# Altium PCB SkyDriver飞行控制器-IMU板V2.PcbDoc
Units mil, origin at the board's own origin, x right, y up, seen from the top; angles counter-clockwise.
Board outline 865 x 865 mil, 2 copper layers (Top Layer, Bottom Layer); 43 components, 19 nets, 149 pads, 44 vias.
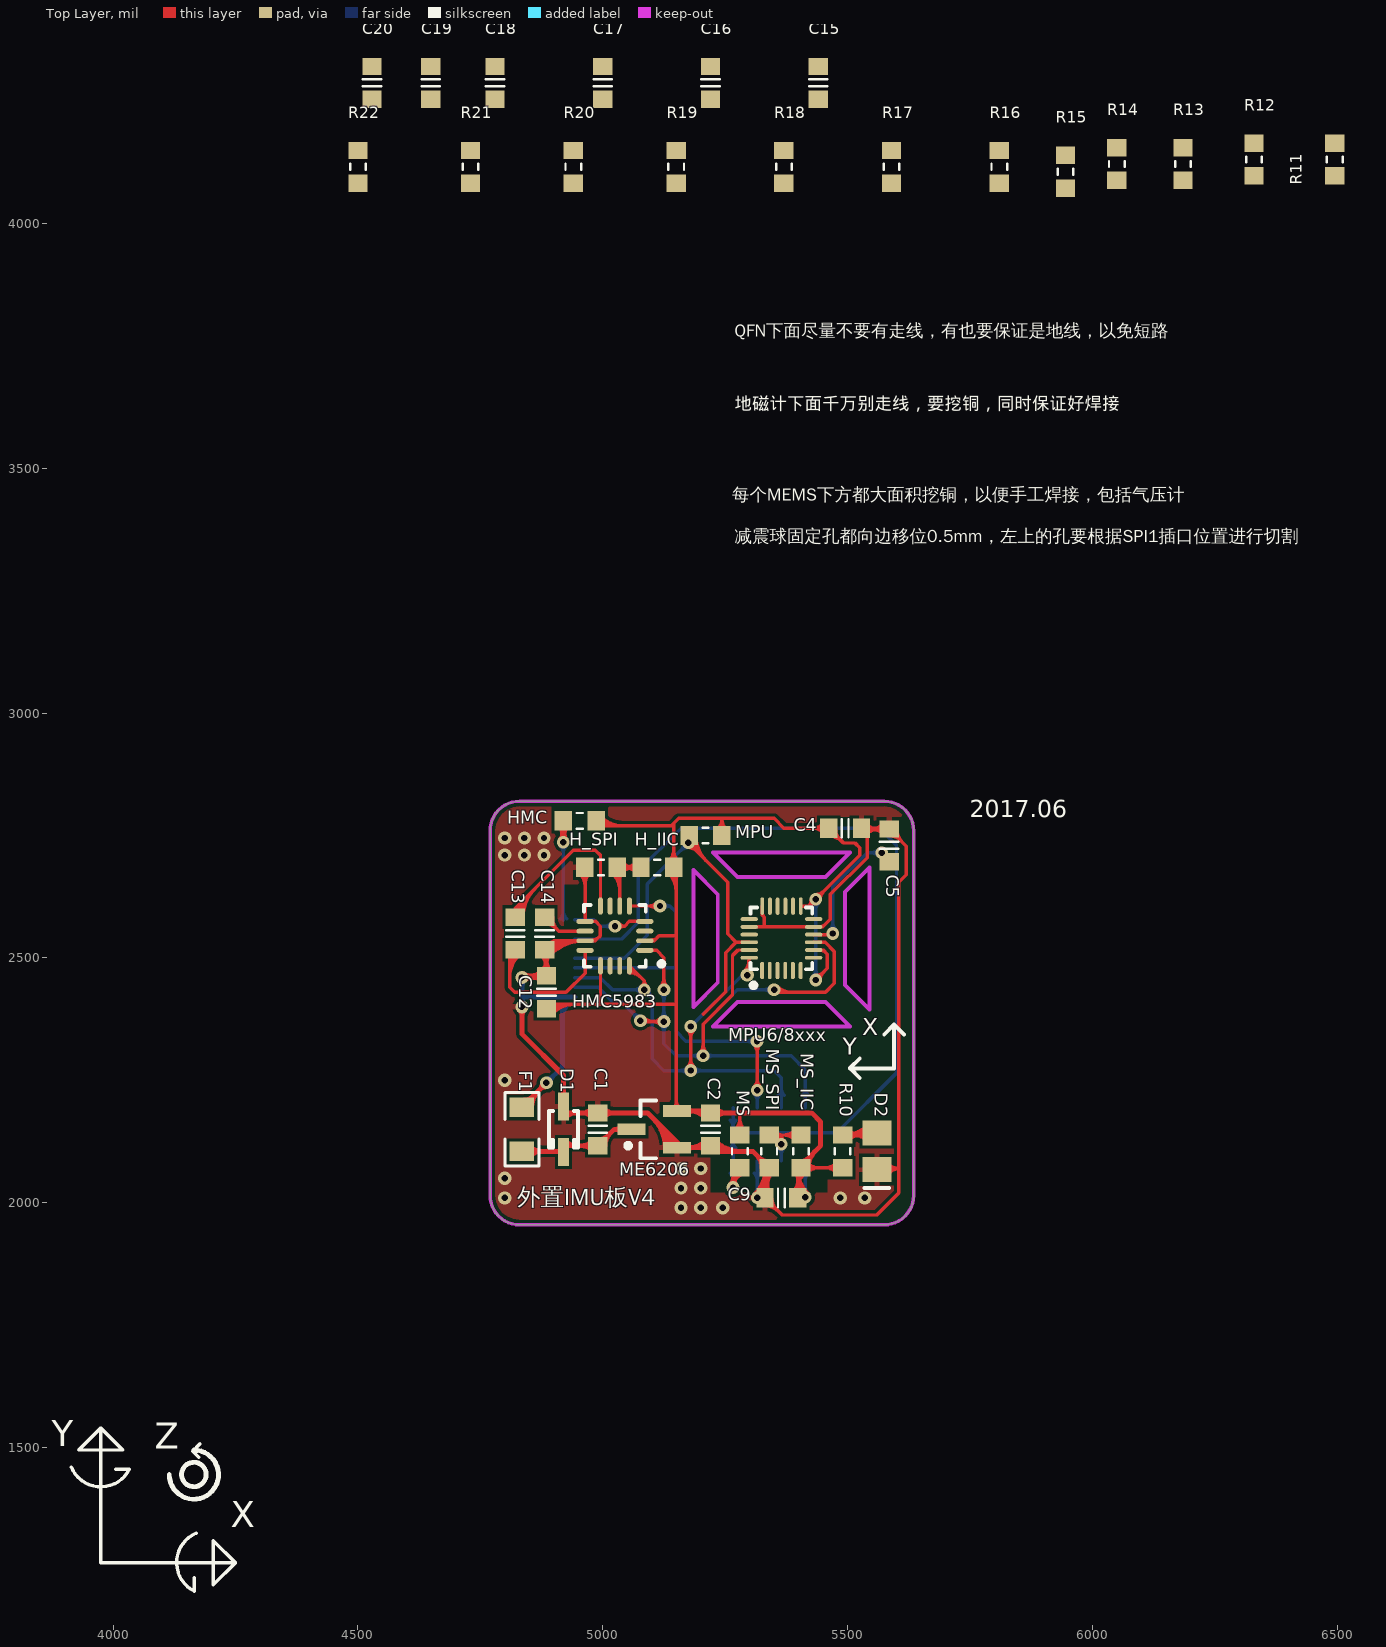
[diagram p0: Top Layer view]
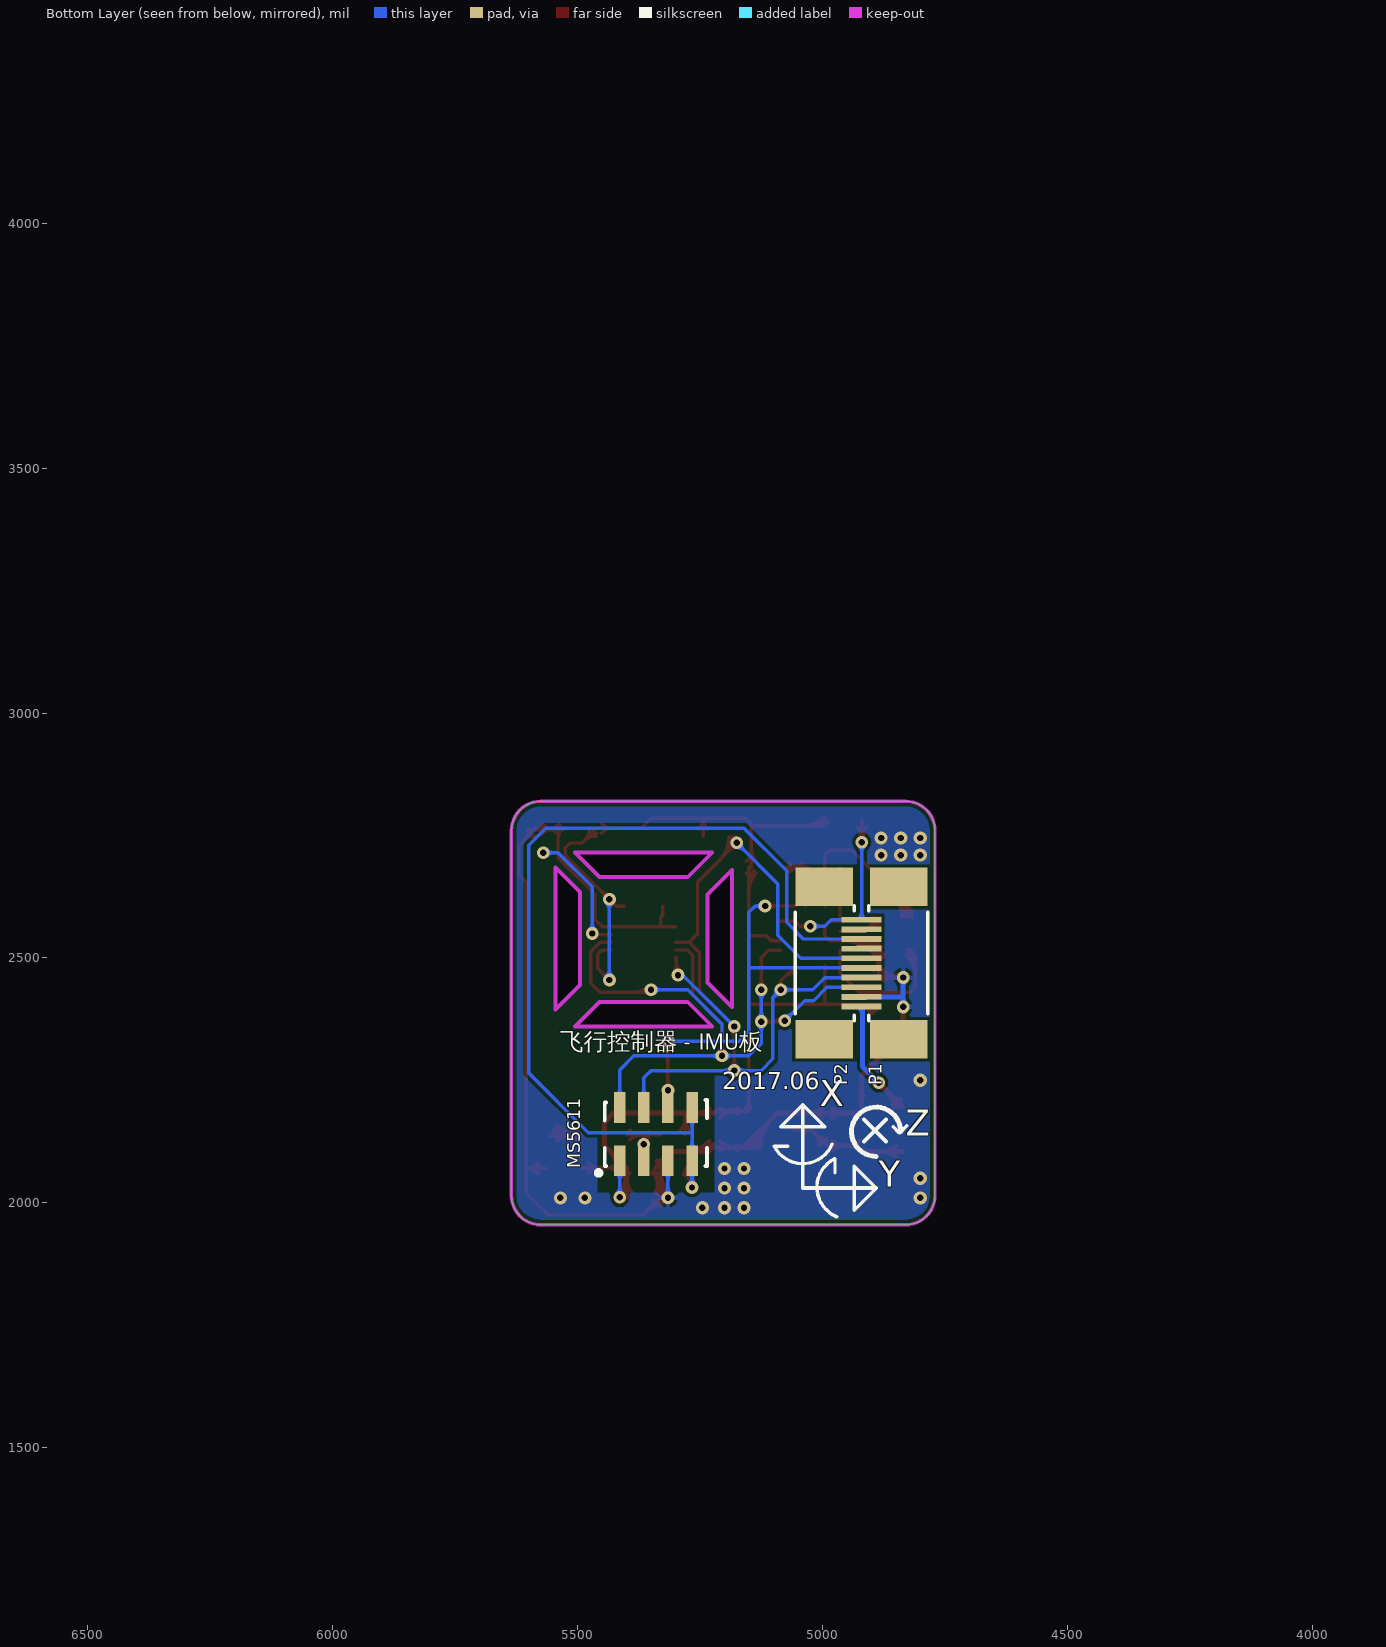
[diagram p1: Bottom Layer view, seen from below]

## Layer stack, top to bottom
Top Solder: solder mask 0.4, Solder Resist, Dk 3.5
Top Layer: signal copper 1.4
Dielectric1: dielectric 12.6, FR-4, Dk 4.8
Bottom Layer: signal copper 1.4
Bottom Solder: solder mask 0.4, Solder Resist, Dk 3.5

## Board outline
4770,2015 4770,2760 cw(c4830,2760) 4830,2820 5575,2820 cw(c5575,2760) 5635,2760 5635,2015 cw(c5575,2015) 5575,1955 4830,1955 cw(c4830,2015)
cut-out: 5225,2360 5505,2360 5455,2410 5275,2410
cut-out: 5495,2445 5545,2395 5545,2685 5495,2635
cut-out: 5185,2400 5185,2680 5235,2630 5235,2450
cut-out: 5185,2400 5185,2680 5235,2630 5235,2450
cut-out: 5225,2715 5275,2665 5455,2665 5505,2715

## Design rules (kind name [scope] priority, off if disabled: settings)
Clearance [All] p1: gap=7 ignorepadtopadclearanceinfootprint=FALSE except(0: Arc-Hole Track-Hole SMDPad-Hole THPad-Hole Via-Hole Fill-Hole Poly-Hole Region-Hole Text-Hole)
ComponentClearance [All] p1 off: gap=10 collisioncheckmode=3 verticalgap=10 showdistances=FALSE
PolygonConnect [All] p1: connectstyle=Relief reliefconductorwidth=10 reliefentries=4 polygonreliefangle="90 Angle" airgapwidth=10
RoutingVias [All] p1: holewidth=13 width=26 viastyle="Through Hole" minholewidth=12 minwidth=24 maxholewidth=240 maxwidth=255
SMDNeckDown [All] p1: percent=50.000
SilkToSolderMaskClearance SilkscreenOverComponentPads [IsPad] p1: minsilkscreentomaskgap=10 clearancetoexposedcopper=TRUE
SolderMaskExpansion [All] p1: expansion=4
Width [All] p1: maxlimit=200 minlimit=6 preferedwidth=7
28 further rules are at their usual default settings.

## Components (designator, comment, footprint, x,y, rotation, side; value= is the part's Value field where it differs from the comment)
C1 "Cap_0603" CAP_0603 4990,2150 r90 top
C2 "Cap_0603" CAP_0603 5220,2150 r270 top
C4 "Cap_0603" CAP_0603 5495,2765 r0 top
C5 "Cap_0603" CAP_0603 5585,2730 r270 top
C9 "Cap_0603" CAP_0603 5365,2010 r0 top
C12 "Cap_0603" CAP_0603 4885,2430 r270 top
C13 "Cap_0603" CAP_0603 4821.38,2550 r270 top
C14 "Cap_0603" CAP_0603 4881.38,2550 r90 top
C15 "Cap_0603" CAP_0603 5440,4287.28 r90 top
C16 "Cap_0603" CAP_0603 5220,4287.28 r90 top
C17 "Cap_0603" CAP_0603 5000,4287.28 r90 top
C18 "Cap_0603" CAP_0603 4780,4287.28 r90 top
C19 "Cap_0603" CAP_0603 4648.62,4287.28 r90 top
C20 "Cap_0603" CAP_0603 4528.62,4287.28 r90 top
D1 "SS14" SOD323 4920,2150 r270 top
D2 "LED0" LED_0805 5560,2105 r270 top
F1 "Fuse" 0805s 4835,2195 r270 top
H_IIC "Res_0603" RES_0603 5111.54,2685 r180 top
H_SPI "Res_0603" RES_0603 4996.54,2685 r0 top
HMC "Res_0603" RES_0603 4953,2780 r180 top
HMC5983 "HMC5983" "QFN16M - 3*3" 5025,2545 r180 top
ME6206 "ME6206" sot23_M 5105,2150 r180 top
MPU "Res_0603" RES_0603 5210,2750 r180 top
MPU6/8xxx "MPU6500/6881" "QFN24M - 3*3" 5365,2540 r90 top
MS "Res_0603" RES_0603 5280,2105 r270 top
MS5611 "MS5611" "QFN8 - MS5611" 5340,2140 r90 bottom
MS_IIC "Res_0603" RES_0603 5405,2105 r90 top
MS_SPI "Res_0603" RES_0603 5340,2105 r90 top
P1 "Header 10" "FPC0.5 - Header10" 4867,2485 r180 bottom
P2 "Header 10" "FPC0.5 - Header10" 4973,2494 r0 bottom
R10 "Res_0603" RES_0603 5490,2105 r270 top
R11 "Res_0603" RES_0603 6495,4130.75 r90 top
R12 "Res_0603" RES_0603 6330,4130.75 r90 top
R13 "Res_0603" RES_0603 6185,4121.5 r90 top
R14 "Res_0603" RES_0603 6050,4121.5 r90 top
R15 "Res_0603" RES_0603 5945,4105.75 r90 top
R16 "Res_0603" RES_0603 5810,4115.75 r90 top
R17 "Res_0603" RES_0603 5590,4115.75 r90 top
R18 "Res_0603" RES_0603 5370,4115.75 r90 top
R19 "Res_0603" RES_0603 5150,4115.75 r90 top
R20 "Res_0603" RES_0603 4940,4115.75 r90 top
R21 "Res_0603" RES_0603 4730,4115.75 r90 top
R22 "Res_0603" RES_0603 4500,4115.75 r90 top

## Footprints (in the part's own frame and the unit in brackets; to place one, negate y for a bottom-side part, rotate by r counter-clockwise, add the part's x,y. Pads: shape width x height; smd on the part's side, far side on the other; paste and mask are expansions set on the pad)
0805s [mil]
  rect 40x50 smd: 1(0,0) 2(90,0)
  silkscreen extent -30,-35 120,35
CAP_0603 [mm]
  rect 0.9x1 smd: 1(-0.85,0) 2(0.85,0)
  Top Layer pour cut-out: -0.4,0.6 0.4,0.6 0.4,-0.6 -0.4,-0.6
  silkscreen extent -0.18,-0.48 0.18,0.48, body extent -0.85,-0.45 0.85,0.45, height 0.89
"FPC0.5 - Header10" [mm]
  rect 3x2 smd: 0(0.584,-3.835) 0(0.584,4.064)
  rect 1.3x0.3 smd: 1(-1.727,2.362) 2(-1.727,1.862) 3(-1.727,1.362) 4(-1.727,0.862) 5(-1.727,0.362) 6(-1.727,-0.138) 7(-1.727,-0.638) 8(-1.727,-1.138) 9(-1.727,-1.638) 10(-1.727,-2.138)
  silkscreen extent -1.73,-2.87 2.08,3.1
LED_0805 [mm]
  rect 1.3x1.5 smd: 1(-0.95,0) 2(0.95,0)
  silkscreen extent 1.91,-0.63 1.91,0.64
"QFN8 - MS5611" [mm]
  rect 1.6x0.6 smd: 1(-1.377,1.875) 2(-1.377,0.625) 3(-1.377,-0.625) 4(-1.377,-1.875) 5(1.377,-1.875) 6(1.377,-0.625) 7(1.377,0.625) 8(1.377,1.875)
  silkscreen extent -2.13,-2.65 1.78,3.1, body extent -1.6,-2.5 1.6,2.5, height 1
"QFN16M - 3*3" [mm]
  oval 0.9x0.25 smd: 1(-1.55,0.75) 2(-1.55,0.25) 3(-1.55,-0.25) 4(-1.55,-0.75) 9(1.55,-0.75) 10(1.55,-0.25) 11(1.55,0.25) 12(1.55,0.75)
  oval 0.25x0.9 smd: 5(-0.75,-1.55) 6(-0.25,-1.55) 7(0.25,-1.55) 8(0.75,-1.55) 13(0.75,1.55) 14(0.25,1.55) 15(-0.25,1.55) 16(-0.75,1.55)
  silkscreen extent -2.54,-1.6 1.6,1.6, body extent -1.58,-1.58 1.58,1.58, height 0.8
"QFN24M - 3*3" [mm]
  oval 0.9x0.2 smd: 1(-1.67,1.003) 2(-1.67,0.603) 3(-1.67,0.203) 4(-1.67,-0.197) 5(-1.67,-0.597) 6(-1.67,-0.997) 13(1.67,-1.003) 14(1.67,-0.603) 15(1.67,-0.203) 16(1.67,0.197) 17(1.67,0.597) 18(1.67,0.997)
  oval 0.2x0.9 smd: 7(-1.003,-1.67) 8(-0.603,-1.67) 9(-0.203,-1.67) 10(0.197,-1.67) 11(0.597,-1.67) 12(0.997,-1.67) 19(0.997,1.67) 20(0.597,1.67) 21(0.197,1.67) 22(-0.203,1.67) 23(-0.603,1.67) 24(-1.003,1.67)
  silkscreen extent -2.56,-1.6 1.6,1.6, body extent -1.58,-1.58 1.58,1.58, height 0.8
RES_0603 [mm]
  rect 0.9x1 smd: 1(-0.85,0) 2(0.85,0)
  Top Layer pour cut-out: -0.4,0.6 0.4,0.6 0.4,-0.6 -0.4,-0.6
  silkscreen extent -0.15,-0.41 0.15,0.41, body extent -0.87,-0.47 0.88,0.48, height 0.54
SOD323 [mm] "SOD-323/SC-76; 2"
  rect 1.45x0.55 smd: 1(1.175,0) 2(-1.175,0)
  silkscreen extent -0.95,-0.75 0.95,0.75
sot23_M [mm] "SOT23, 3-Leads, Body 2.9x1.3mm, Pitch 0.95mm, Lead Span 2.3mm - R"
  rect 1.45x0.6 smd: 1(1.175,0) 2(-1.175,-0.95) 3(-1.175,0.95)
  silkscreen extent -0.1,-1.5 1.47,1.5, body extent -0.7,-1.5 0.7,1.5, height 1.1

## Part data
C1 C2 C4 C5 C9 C12 C13 C14 C15 C16 C17 C18 C19 C20: library part Cap
D1: library part "Diode 1N4007", "1 Amp General Purpose Rectifier"
D2: "Typi"
H_IIC H_SPI HMC MPU MS MS_IIC MS_SPI R10 R11 R12 R13 R14 R15 R16 R17 R18 R19 R20 R21 R22: library part Res

## Via types
v1: diameter 26, hole 13, Top Layer to Bottom Layer, 25 vias
v2: diameter 27, hole 13, Top Layer to Bottom Layer, 19 vias

## Nets (pads, with @x,y where several pads share a name; then routed paths per layer and width w, separated by ;. In a path a pad name is that pad's centre, name@x,y a point inside that pad or via, vN(x,y) a via of type N, cw(c..) or ccw(c..) an arc to the next point about the centre after c; other vN are vias at no path point)
+3V3: C2.1 C4.1 C9.2 C12.2 H_IIC.1 HMC5983.2 HMC5983.13 HMC.1 ME6206.2 MPU6/8xxx.8 MPU6/8xxx.13 MPU.1 MS5611.1 MS.1 MS_IIC.1 R10.2 | length 4308.4
  Top Layer w7: C12.2@4885,2405 5150,2405 ; C12.2@4887.12,2396.38 cw(c4907.92,2375.58) 4907.92,2405 ; C12.2@4892.07,2391.43 cw(c4924.82,2358.68) 4924.82,2405 ; C12.2@4897.02,2386.48 cw(c4941.72,2341.78) 4941.72,2405 ; HMC.1@4986.62,2778.18 ccw(c5006.38,2797.94) 5006.38,2770 ; HMC.1@4991.57,2783.13 ccw(c5023.28,2814.84) 5023.28,2770 ; 4995.47,2405 HMC5983.13 ; HMC.1@4996.46,2770 5140,2770 5145,2775 ; HMC.1@4996.52,2788.08 ccw(c5040.17,2831.74) 5040.17,2770 ; HMC5983.2 5105.16,2535.16 5115,2545 5150,2545 ; HMC5983.2@5098.82,2536.58 ccw(c5098.82,2555.32) 5112.07,2542.07 ; H_IIC.1@5134.95,2672.98 cw(c5098.61,2636.64) 5150,2636.64 ; H_IIC.1@5134.95,2697.02 ccw(c5110.68,2721.29) 5145,2721.29 ccw(c5179.32,2721.29) H_IIC.1@5155.05,2697.02 ; H_IIC.1@5139.9,2677.93 cw(c5115.51,2653.54) 5150,2653.54 ; H_IIC.1 5145,2775 ; ME6206.2@5145.38,2193.28 ccw(c5134.24,2204.42) 5150,2204.42 ; ME6206.2@5150,2188.66 5150,2405 ; 5150,2210.51 ccw(c5174.37,2210.51) ME6206.2@5157.14,2193.28 ; 5150,2660.78 cw(c5167.25,2660.78) H_IIC.1@5155.05,2672.98 ; H_IIC.1@5150,2685 5150,2545 ; MPU.1@5234.06,2762.63 ccw(c5215.68,2783.46) 5243.47,2783.46 ; MPU.1 5243.47,2783.47 ; MPU.1@5252.87,2762.63 cw(c5271.25,2783.46) 5243.47,2783.46 ; MS.1@5269.95,2148.52 ccw(c5245.68,2172.79) 5280,2172.79 ccw(c5314.32,2172.79) MS.1@5290.05,2148.52 ; MS.1 5280,2183.46 ; C9.2@5388.41,2022.02 ccw(c5364.14,2046.29) 5398.47,2046.29 ccw(c5432.79,2046.29) C9.2@5408.52,2022.02 ; C9.2@5391.19,2024.18 ccw(c5379.72,2043.43) 5401.44,2037.93 ; MS_IIC.1@5392.98,2061.48 cw(c5379.73,2048.24) 5398.47,2048.24 ; C9.2 5398.47,2070 ccw(c5470.98,2070) v1@5420.44,2017.99 ; C9.2@5398.47,2020.3 ccw(c5422.68,2020.3) C9.2@5405.8,2002.93 ; C9.2@5398.47,2026.19 cw(c5448.37,2026.19) MS_IIC.1@5413.08,2061.48 ; 5398.47,2036.87 ccw(c5438.78,2036.87) C9.2@5410.68,2007.95 ; 5398.47,2043.09 cw(c5431.48,2043.09) MS_IIC.1@5408.13,2066.43 ; 5398.47,2053.43 ccw(c5454.88,2053.43) C9.2@5415.56,2012.97 ; 5399.8,2031.48 ccw(c5414.77,2027.69) C9.2@5403.66,2016.98 ; 5402.07,2033.19 cw(c5379.76,2020.31) C9.2@5404.64,2013.64 ; C9.2@5402.69,2018.74 ccw(c5411.59,2023.67) C9.2@5413.38,2013.64 ; 5402.89,2043.68 ccw(c5425.43,2037.98) C9.2@5408.7,2021.84 ; 5403.08,2031.99 cw(c5383.39,2021.09) C9.2@5404.79,2014.12 ; 5404.07,2029.73 ccw(c5421.48,2039.78) v1@5416.28,2020.36 ; 5404.1,2030.14 ccw(c5422.14,2040.12) v1@5416.44,2020.31 ; MPU6/8xxx.13 5420.74,2605.74 ; MS_IIC.1 R10.2@5495,2071.54 ; MS_IIC.1@5417.02,2061.48 cw(c5441.29,2037.21) 5441.29,2071.54 cw(c5441.29,2105.85) MS_IIC.1@5417.02,2081.59 ; v1@5425.54,2619.1 cw(c5408.97,2617.52) 5420.74,2605.74 ; MPU6/8xxx.8 5450.08,2516.25 5458.96,2507.37 5458.96,2478.96 v1(5435,2455) ; v1@5434.1,2610.54 ccw(c5432.52,2593.97) 5420.74,2605.74 ; v1@5435,2464.5 ccw(c5435,2487.43) 5451.22,2471.22 ccw(c5467.44,2455) v1@5444.5,2455 ; v1@5435,2629.5 ccw(c5435,2652.43) 5451.22,2636.22 ccw(c5467.44,2620) v1@5444.5,2620 ; MPU6/8xxx.8@5444.52,2515.81 cw(c5444.52,2501.35) 5454.75,2511.58 ; C4.1@5451.48,2754.95 ccw(c5427.21,2730.68) 5427.21,2765 ccw(c5427.21,2799.32) C4.1@5451.48,2775.05 ; C4.1@5461.53,2748.81 cw(c5461.53,2709.74) 5489.16,2737.37 ; C4.1@5461.53,2755.81 cw(c5461.53,2733.64) C4.1@5477.21,2749.32 ; C4.1@5475.75,2763.03 ccw(c5505.32,2763.03) 5484.41,2742.12 ; R10.2@5477.98,2061.48 ccw(c5453.71,2037.21) 5453.71,2071.54 ccw(c5453.71,2105.86) R10.2@5477.98,2081.59 ; 5145,2775 5155,2785 5350,2785 5370,2765 C4.1 5491.72,2734.81 5515.19,2734.81 5525,2725 5525,2710 v1(5435,2620) 5420.74,2605.74 ; 5150,2405 5150,2545
  Top Layer w10: ME6206.2 C2.1@5216.06,2187.4 ; ME6206.2@5172.81,2182.59 cw(c5184.44,2170.96) 5184.44,2187.4 cw(c5184.44,2203.84) ME6206.2@5172.81,2192.22 ; ME6206.2@5177.83,2187.4 cw(c5177.83,2143.26) C2.1@5209.04,2174.47 ; 5196.83,2187.4 ccw(c5196.83,2204.66) C2.1@5209.04,2192.46 ; C2.1 5426.53,2183.47 5445,2165 5445,2116.54 MS_IIC.1@5400,2071.53 ; C2.1@5230.96,2174.47 cw(c5252.67,2152.76) 5252.67,2183.47 cw(c5252.67,2214.17) C2.1@5230.96,2192.46 ; MS_IIC.1@5406.97,2084.25 ccw(c5406.97,2098.13) MS_IIC.1@5416.78,2088.32 ; MS_IIC.1@5409.68,2071.53 cw(c5433.07,2071.53) MS_IIC.1@5416.53,2088.07 ; MS_IIC.1@5419.68,2071.53 cw(c5467.21,2071.53) 5433.6,2105.14
  Bottom Layer w7: v1@5407.1,2017.9 ccw(c5390.88,2034.12) 5413.82,2034.12 ccw(c5436.75,2034.12) v1@5420.54,2017.9 ; MS5611.1@5407.94,2060.23 cw(c5393.75,2046.04) 5413.82,2046.04 cw(c5433.88,2046.04) MS5611.1@5419.7,2060.23 ; v1(5413.82,2011.18) MS5611.1 ; v1@5428.28,2461.72 ccw(c5412.06,2477.93) 5435,2477.93 ccw(c5457.94,2477.93) v1@5441.72,2461.72 ; v1@5428.28,2613.28 cw(c5412.06,2597.07) 5435,2597.07 cw(c5457.94,2597.07) v1@5441.72,2613.28 ; v1(5435,2455) v1(5435,2620)
AK_CS: P1.4 P2.7
BMP_CS: P1.2 P2.9
GND: C1.2 C2.2 C4.2 C5.1 C9.1 C12.1 C14.1 D1.2 D2.2 H_SPI.1 HMC5983.9 HMC5983.11 ME6206.3 MPU6/8xxx.11 MPU6/8xxx.18 MPU6/8xxx.20 MS5611.3 MS_SPI.1 P1.9 P2.2 | length 5134.8
  Top Layer w7: C14.1@4873.29,2506.48 cw(c4845.04,2478.23) C12.1@4885,2478.23 ; C12.1@4874.95,2473.52 ccw(c4850.68,2497.79) 4885,2497.79 ccw(c4919.32,2497.79) C12.1@4895.05,2473.52 ; C12.1@4876.63,2476.16 ccw(c4871.75,2485.83) 4882.21,2488.63 ; C14.1@4878.24,2511.43 cw(c4861.94,2495.13) 4885,2495.13 ; C14.1@4878.55,2521.33 cw(c4911.93,2487.95) 4911.93,2535.16 ; C14.1 4900,2535.16 ; 4883.25,2484.75 ccw(c4897.53,2488.58) C12.1@4890.14,2475.78 ; C14.1@4883.5,2516.38 cw(c4928.83,2471.05) 4928.83,2535.16 ; C12.1 C14.1@4885,2512.91 ; 4885,2486.2 cw(c4913.68,2486.2) 4893.4,2506.48 cw(c4962.63,2437.25) HMC5983.11@4962.63,2535.16 ; C14.1@4885.67,2530.56 ccw(c4888.37,2546.79) 4900,2535.16 ; C14.1@4888.45,2511.43 cw(c4945.73,2454.15) 4945.73,2535.16 ; C14.1@4896.78,2521.18 cw(c4909.56,2525.6) 4900,2535.16 ; H_SPI.1@4953.02,2672.98 cw(c4926.56,2646.52) 4963.98,2646.52 ; H_SPI.1@4957.97,2677.93 cw(c4943.46,2663.42) 4963.98,2663.42 ; 4963.98,2650.9 cw(c4995.2,2650.9) H_SPI.1@4973.12,2672.98 ; H_SPI.1@4963.98,2684.09 HMC5983.9 4985.47,2574.53 4995,2565 4995,2545 4985.16,2535.16 HMC5983.11 4900,2535.16 ; HMC5983.11@4976.77,2536.58 ccw(c4976.77,2560.26) 4993.51,2543.51 ; MPU6/8xxx.20 5330,2563.5 ; v1@5308.86,2017.29 ccw(c5258.94,2070) 5331.53,2070 C9.1 5366.53,1975 5560,1975 5605,2020 5605,2070 ; v1@5312.93,2019.57 ccw(c5307.48,2039.94) C9.1@5325.74,2029.4 ; v1@5313.67,2012.21 ccw(c5274.36,2053.72) 5331.53,2053.72 ; C9.1@5315.39,2000.89 cw(c5315.39,1939.94) 5358.49,1983.04 ; C9.1@5315.39,2007.89 cw(c5315.39,1963.84) C9.1@5346.54,1994.99 ; C9.1@5315.39,2014.89 cw(c5315.39,1987.74) C9.1@5334.59,2006.94 ; C9.1@5318.49,2007.13 ccw(c5289.77,2037.45) 5331.54,2037.45 ; C9.1@5321.48,2022.02 ccw(c5297.21,2046.29) 5331.54,2046.29 ccw(c5365.86,2046.29) C9.1@5341.59,2022.02 ; C9.1@5323.3,2002.04 ccw(c5305.18,2021.18) C9.1@5331.53,2021.18 ; C9.1@5324.42,2024.27 ccw(c5311.46,2046.69) 5336.47,2040 ; C9.1@5324.57,2012.85 cw(c5348.51,2019.27) 5327.05,2031.66 ; MPU6/8xxx.18 5325.76,2587.29 5330,2583.05 5330,2563.5 ; MPU6/8xxx.18@5326.19,2591.96 ccw(c5338.52,2591.96) 5329.8,2583.24 ; MS_SPI.1@5327.98,2061.48 cw(c5319.39,2052.89) 5331.53,2052.89 ; C9.1@5331.53,1993.81 cw(c5331.53,1954.74) 5359.16,1982.37 ; C9.1@5331.53,2000.81 cw(c5331.53,1978.64) C9.1@5347.21,1994.32 ; C9.1@5331.53,2021.53 cw(c5388.03,2021.53) MS_SPI.1@5348.08,2061.48 ; 5331.53,2038.43 cw(c5371.13,2038.43) MS_SPI.1@5343.13,2066.43 ; 5334.26,2031.74 ccw(c5351.54,2027.12) C9.1@5337.29,2016.33 ; 5337.96,2045.57 ccw(c5365.99,2038.08) C9.1@5342.87,2020.55 ; C9.1@5345.75,2008.03 ccw(c5375.32,2008.03) 5354.41,1987.12 ; MPU6/8xxx.11@5444.52,2563.93 ccw(c5444.52,2576.26) 5453.24,2567.54 ; C4.2 5540,2763.46 5540,2705 5465,2630 5465,2579.31 5449.19,2563.5 MPU6/8xxx.11 5330,2563.5 ; D2.2@5562.4,2070 5605,2070 ; D2.2@5575.7,2077.05 ccw(c5590.4,2088.85) 5590.4,2070 ; D2.2@5577.22,2060.43 cw(c5593.26,2051.76) 5593.26,2070 ; D2.2@5581.16,2081.43 ccw(c5605,2100.57) 5605,2070 ; D2.2@5583.37,2057.1 cw(c5605,2045.42) 5605,2070 ; C5.1 5620,2728.46 5620,2670 5605,2655 5605,2070 ; C5.1@5586.97,2749.25 cw(c5586.97,2719.68) 5607.88,2740.59 ; C5.1@5594.18,2763.47 ccw(c5616.36,2763.47) C5.1@5600.68,2747.79 ; C5.1@5601.18,2763.47 ccw(c5640.26,2763.47) 5612.63,2735.84
  Top Layer w10: v1@4829.34,2394.34 cw(c4815.69,2380.69) 4835,2380.69 cw(c4854.31,2380.69) v1@4840.66,2394.34 ; v1(4835,2400) 4835,2345 4920,2260 D1.2 ; v1(4835,2460) 4881.53,2460 C12.1 ; v1@4839,2466.93 ccw(c4852.62,2490.51) 4859.67,2464.21 ; v1@4840.66,2454.34 cw(c4854.31,2440.69) 4854.31,2460 cw(c4854.31,2479.31) v1@4840.66,2465.66 ; v1@4841.93,2456 cw(c4851.79,2450.3) 4848.85,2461.31 ; v1@4843.96,2460 ccw(c4843.96,2502.53) C12.1@4874.04,2472.46 ; 4860.7,2460 cw(c4860.7,2441.13) C12.1@4874.04,2454.47 ; D1.2@4915.88,2218.1 ccw(c4905.93,2228.04) 4920,2228.04 ccw(c4934.07,2228.04) D1.2@4924.12,2218.1 ; D1.2@4924.12,2174.42 cw(c4945.95,2152.59) 4945.95,2183.47 ; D1.2@4925,2183.47 C1.2 5091.53,2183.47 ME6206.3@5160,2115 ; C1.2@4979.04,2174.47 ccw(c4957.33,2152.76) 4957.33,2183.47 ccw(c4957.33,2214.17) C1.2@4979.04,2192.46 ; C1.2@5000.96,2174.47 cw(c5022.67,2152.76) 5022.67,2183.47 cw(c5022.67,2214.17) C1.2@5000.96,2192.46 ; 5103.19,2171.81 cw(c5043.98,2112.6) ME6206.3@5127.72,2112.6 ; 5120.26,2154.74 cw(c5078.12,2112.6) ME6206.3@5137.72,2112.6 ; 5137.33,2137.67 cw(c5112.26,2112.6) ME6206.3@5147.72,2112.6 ; ME6206.3 C2.2@5216.06,2112.6 ; ME6206.3@5154.4,2120.6 cw(c5146.41,2112.6) ME6206.3@5157.72,2112.6 ; ME6206.3@5172.81,2107.78 cw(c5184.44,2096.16) 5184.44,2112.6 cw(c5184.44,2129.04) ME6206.3@5172.81,2117.41 ; ME6206.3@5177.83,2112.6 ccw(c5177.83,2156.74) C2.2@5209.04,2125.53 ; 5196.83,2112.6 cw(c5196.83,2095.34) C2.2@5209.04,2107.54 ; C2.2 5231.53,2105 5306.53,2105 MS_SPI.1 ; C2.2@5223.89,2118.46 ccw(c5256.37,2150.94) 5256.37,2105 ; C2.2@5230.96,2125.53 ccw(c5280.52,2175.08) 5280.52,2105 ; 5314.93,2096.6 cw(c5289.86,2071.53) MS_SPI.1@5325.31,2071.53 ; 5319.68,2091.85 ccw(c5338.03,2110.2) MS_SPI.1@5338.03,2084.25 ; C4.2@5530,2763.47 C5.1 ; C4.2@5537.46,2754.04 cw(c5560.21,2731.28) 5560.21,2763.46 ; C4.2@5537.46,2772.02 ccw(c5558.12,2792.68) 5558.12,2763.47 ; C5.1@5574.04,2754.47 ccw(c5552.33,2732.76) 5552.33,2763.47 ccw(c5552.33,2794.17) C5.1@5574.04,2772.46
  Bottom Layer w7: v1@5308.68,2017.11 ccw(c5292.46,2033.33) 5315.39,2033.33 ccw(c5338.33,2033.33) v1@5322.11,2017.11 ; MS5611.3@5309.52,2060.23 cw(c5295.33,2046.04) 5315.39,2046.04 cw(c5335.46,2046.04) MS5611.3@5321.27,2060.23 ; v1(5315.39,2010.39) MS5611.3
  Bottom Layer w10: v1@4829.34,2405.66 ccw(c4815.69,2419.31) 4835,2419.31 ccw(c4854.31,2419.31) v1@4840.66,2405.66 ; v1@4829.34,2454.34 cw(c4815.69,2440.69) 4835,2440.69 cw(c4854.31,2440.69) v1@4840.66,2454.34 ; v1(4835,2400) v1(4835,2460) ; 4835.52,2420.52 P1.9@4943,2420.52
  other v2: 5160,1990 5200,1990 5245,1990 4800,2010 5485,2010 5535,2010 5160,2030 5200,2030 4800,2050 5160,2070 5200,2070 4800,2250 4800,2710 4840,2710 4880,2710 4800,2745 4840,2745 4880,2745
HMC_CS: HMC5983.4 HMC.2 P1.1 P2.10 | length 638.7
  Top Layer w7: HMC.2@4909.48,2767.98 cw(c4885.21,2743.71) 4919.54,2743.71 cw(c4953.86,2743.71) HMC.2@4929.59,2767.98 ; v1@4912.34,2742.73 ccw(c4899.84,2753.49) 4915.77,2757.76 ; v1@4912.82,2743.25 ccw(c4896.6,2759.47) 4919.54,2759.47 ccw(c4942.47,2759.47) v1@4926.25,2743.25 ; v1@4914.79,2744.76 ccw(c4906.49,2759.14) 4922.52,2754.84 ; 4916.55,2754.84 ccw(c4932.58,2759.14) v1@4924.29,2744.76 ; v1(4919.54,2736.54) HMC.2 ; 4923.3,2757.76 ccw(c4939.23,2753.49) v1@4926.73,2742.73 ; v1(5025,2565) 5045,2565 ; v1@5032.36,2559 cw(c5045,2548.7) 5045,2565 ; v1@5032.36,2571 ccw(c5045,2581.3) 5045,2565 ; HMC5983.4 5054.53,2574.53 5045,2565
  Bottom Layer w7: v1@4912.82,2729.82 cw(c4896.6,2713.6) 4919.54,2713.6 cw(c4942.47,2713.6) v1@4926.25,2729.82 ; P2.10@4913.61,2579.7 ccw(c4899.32,2594) 4919.54,2594 ; P2.10@4919.54,2577 v1(4919.54,2736.54) ; 4919.54,2596.41 ccw(c4942.92,2596.41) P2.10@4926.39,2579.87 ; P1.1@4943,2578 4982,2578 4995,2565 v1(5025,2565) ; v1@5018.28,2558.28 ccw(c5002.06,2542.07) 5002.06,2565 ccw(c5002.06,2587.93) v1@5018.28,2571.72
MPU_CS: MPU6/8xxx.22 MPU.2 P1.5 P2.6 | length 1092.1
  Top Layer w7: MPU.2@5174.6,2732.53 cw(c5169.95,2703.91) 5195.49,2717.66 ; v1@5175,2725.5 cw(c5175,2702.57) 5191.22,2718.78 cw(c5207.44,2735) MPU.2@5184.5,2735 ; v1(5175,2735) 5255,2655 5255,2549.2 5272.2,2532 ; MPU.2@5175.72,2739.44 cw(c5172.82,2721.58) 5188.75,2730.16 ; MPU.2@5176.75,2748.03 ccw(c5212.44,2748.03) 5187.2,2722.8 ; MPU.2@5177.88,2731.54 ccw(c5166.98,2744.63) MPU.2@5183.92,2746.35 ; MPU.2@5183.75,2748.03 ccw(c5236.34,2748.03) 5199.15,2710.85 ; MPU.2@5190.75,2748.03 ccw(c5260.24,2748.03) 5211.1,2698.9 ; 5205.1,2384.9 5251,2430.8 5251,2510.8 5272.2,2532 ; MPU6/8xxx.22 5272.2,2532
  Bottom Layer w7: P1.5@4943,2499.26 5044.26,2499.26 5091,2546 5091,2651 v1(5175,2735) ; v1@5165.5,2735 cw(c5142.56,2735) 5158.78,2718.78 cw(c5175,2702.57) v1@5175,2725.5
MS_CS: MS5611.4 MS5611.5 MS.2 P1.3 P2.8 | length 2167.1
  Top Layer w7: v1@5259.46,2037.9 ccw(c5243.25,2054.12) 5266.18,2054.12 ccw(c5289.12,2054.12) v1@5272.9,2037.9 ; v1@5261.43,2039.41 ccw(c5254.2,2051.93) 5268.17,2048.19 ; v1@5264.29,2040.49 ccw(c5262.6,2048.78) 5270.77,2046.59 ccw(c5279.73,2044.19) v1@5273.03,2037.76 ; v1@5266.18,2029.48 cw(c5298.93,2029.48) MS.2@5284.36,2058.8 ; v1(5266.18,2031.18) MS.2@5266.18,2057.72 ; v1@5266.18,2040.77 cw(c5293.31,2040.77) MS.2@5281.24,2065.07 ; 5266.18,2052.07 cw(c5287.7,2052.07) MS.2@5278.13,2071.34 ; 5268.7,2050.19 ccw(c5279.88,2047.19) v1@5272.36,2038.4
  Bottom Layer w7: P1.3@4943,2538.63 5038.63,2538.63 5073,2573 5073,2678 5160,2765 5565,2765 5600,2730 5600,2265 5478.11,2143.11 5269.29,2143.11 5266.18,2140 ; v1@5259.46,2037.9 ccw(c5243.25,2054.12) 5266.18,2054.12 ccw(c5289.12,2054.12) v1@5272.9,2037.9 ; MS5611.4@5260.3,2060.23 cw(c5246.12,2046.04) 5266.18,2046.04 cw(c5286.25,2046.04) MS5611.4@5272.06,2060.23 ; MS5611.4@5260.3,2111.35 ccw(c5246.12,2125.54) 5266.18,2125.54 ccw(c5286.25,2125.54) MS5611.4@5272.06,2111.35 ; MS5611.5@5260.3,2168.65 cw(c5246.12,2154.46) 5266.18,2154.46 cw(c5286.25,2154.46) MS5611.5@5272.06,2168.65 ; v1(5266.18,2031.18) MS5611.4 5266.18,2140 ; MS5611.5 5266.18,2140
NetC5_2: C5.2 MPU6/8xxx.10 | length 336.2
  Top Layer w7: MPU6/8xxx.10 5467.75,2547.75 v1(5470,2550)
  Bottom Layer w7: v1@5463.28,2556.72 ccw(c5447.06,2572.93) 5470,2572.93 ccw(c5492.94,2572.93) v1@5476.72,2556.72 ; v1(5470,2550) 5470,2645 5540,2715 v1(5570,2715) ; v1@5563.28,2708.28 ccw(c5547.06,2692.07) 5547.06,2715 ccw(c5547.06,2737.93) v1@5563.28,2721.72
NetC13_1: C13.1 HMC5983.8 | length 539.2
  Top Layer w7: C13.1@4816.56,2583.47 cw(c4848.18,2583.47) 4825.82,2605.82 ; C13.1@4818.15,2597.31 ccw(c4817.2,2601.38) 4821.38,2601.38 ; C13.1 4821.38,2601.38 ; C13.1@4823.56,2583.47 cw(c4872.08,2583.47) 4837.77,2617.77 ; C13.1@4824.6,2597.31 cw(c4825.55,2601.38) 4821.38,2601.38 ; C13.1@4830.56,2583.47 cw(c4895.98,2583.47) 4849.72,2629.72 ; C13.1@4837.56,2583.47 cw(c4919.88,2583.47) 4861.67,2641.67 ; HMC5983.8 4995.47,2709.53 4985,2720 4940,2720 4821.38,2601.38
NetC13_2: C13.2 HMC5983.12 | length 426.5
  Top Layer w7: 4810,2459.5 cw(c4876.44,2459.5) C13.2@4829.46,2506.48 ; 4810,2476.4 cw(c4859.54,2476.4) C13.2@4824.51,2511.43 ; 4810,2493.3 cw(c4842.65,2493.3) C13.2@4819.56,2516.38 ; C13.2@4829.13,2516.53 C13.2 4810,2505.16 4810,2440 4820,2430 4925,2430 4963.98,2468.98 HMC5983.12
NetC14_2: C14.2 HMC5983.10 | length 165.8
  Top Layer w7: C14.2 4910,2554.84 HMC5983.10 ; C14.2@4883.35,2569.25 cw(c4883.35,2539.68) 4904.26,2560.59 ; C14.2@4890.56,2583.47 ccw(c4912.74,2583.47) C14.2@4897.06,2567.79 ; C14.2@4897.56,2583.47 ccw(c4936.64,2583.47) 4909.01,2555.84
NetD2_1: D2.1 R10.1 | length 218
  Top Layer w10: R10.1@5495,2138.47 D2.1@5556.06,2138.47 ; R10.1@5496.85,2138.47 ccw(c5496.85,2201.62) D2.1@5541.5,2156.96 ; R10.1@5500.96,2129.47 cw(c5522.67,2107.76) 5522.67,2138.47 cw(c5522.67,2169.17) R10.1@5500.96,2147.46 ; 5515.86,2138.47 cw(c5515.86,2102.2) D2.1@5541.5,2127.84 ; 5520.99,2138.47 ccw(c5520.99,2177.47) D2.1@5548.57,2149.89
NetH_IIC_2: H_IIC.2 H_SPI.2 HMC5983.6 | length 362.7
  Top Layer w7: H_SPI.2@5019.95,2672.98 cw(c4983.99,2637.02) 5034.84,2637.02 ; H_SPI.2@5024.9,2677.93 cw(c5000.89,2653.92) 5034.84,2653.92 ; HMC5983.6 5034.84,2680.16 H_SPI.2 H_IIC.2 ; 5034.84,2660.4 cw(c5052.63,2660.4) H_SPI.2@5040.05,2672.98 ; H_SPI.2@5040.05,2674.95 cw(c5064.32,2650.68) H_IIC.2@5064.32,2685 ; H_SPI.2@5040.05,2695.05 ccw(c5064.33,2719.33) H_IIC.2@5064.33,2685 ; H_IIC.2@5064.62,2678.42 ccw(c5058.09,2676.17) 5056.3,2682.85 ccw(c5052.28,2697.85) H_IIC.2@5065.74,2690.11 ; H_IIC.2@5064.62,2691.58 cw(c5058.09,2693.83) 5056.3,2687.15 cw(c5052.28,2672.15) H_IIC.2@5065.74,2679.88 ; H_IIC.2@5068.02,2674.95 ccw(c5043.75,2650.68) 5043.75,2685 ccw(c5043.75,2719.32) H_IIC.2@5068.02,2695.05
NetMS5611_2: MS5611.2 MS_IIC.2 MS_SPI.2 | length 281.1
  Top Layer w7: MS_SPI.2@5330,2138.46 5365,2138.46 ; MS_SPI.2@5354.68,2132.09 cw(c5365,2126.92) 5365,2138.46 ; MS_SPI.2@5354.68,2144.84 ccw(c5365,2150.01) 5365,2138.46 ; MS_SPI.2@5359.21,2127.42 ccw(c5351.58,2138.46) 5365,2138.46 ; v1(5364.61,2119.61) 5365,2120 5365,2138.46 ; v1@5370.51,2127.05 cw(c5379.58,2138.46) 5365,2138.46 ; MS_IIC.2@5392.98,2128.41 ccw(c5368.71,2104.14) 5368.71,2138.46 ccw(c5368.71,2172.79) MS_IIC.2@5392.98,2148.52 ; MS_IIC.2@5400,2138.46 5365,2138.46
  Bottom Layer w7: MS5611.2@5357.89,2112.89 cw(c5341.67,2096.67) 5364.61,2096.67 cw(c5387.54,2096.67) MS5611.2@5371.32,2112.89 ; MS5611.2@5360.57,2112.74 ccw(c5356.74,2119.61) v1(5364.61,2119.61) ; MS5611.2 v1(5364.61,2119.61) ; MS5611.2@5368.65,2112.74 cw(c5372.47,2119.61) v1(5364.61,2119.61)
SA0/SDO: HMC5983.5 MPU6/8xxx.9 MS5611.6 P1.6 P2.5 | length 1631.7
  Top Layer w7: HMC5983.5 v1(5116.98,2606.02) ; v1@5110.26,2599.31 ccw(c5094.04,2583.09) 5094.04,2606.02 ccw(c5094.04,2628.96) v1@5110.26,2612.74 ; v1@5308.28,2323.28 cw(c5291.11,2306.11) 5315.39,2306.11 ; v1@5308.68,2236.32 ccw(c5292.46,2252.54) 5315.39,2252.54 ccw(c5338.33,2252.54) v1@5322.11,2236.32 ; v1(5315.39,2229.61) v1@5315.39,2330 ; 5315.39,2308.02 cw(c5336.98,2308.02) v1@5321.72,2323.28 ; v1(5350,2435) 5355,2430 5455,2430 5472.96,2447.96 5472.96,2513.17 5454.13,2532 MPU6/8xxx.9 ; v1@5351.77,2436.77 ccw(c5368.11,2453.11) 5368.11,2430 ; v1@5356.72,2441.72 ccw(c5385.01,2470.01) 5385.01,2430
  Bottom Layer w7: P1.6@4943,2479.57 5149.57,2479.57 ; v1(5116.98,2606.02) 5136.98,2606.02 5150,2593 5150,2350 5170,2330 5205,2330 ; v1@5124.34,2600.02 cw(c5136.97,2589.72) 5136.97,2606.02 cw(c5136.97,2622.32) v1@5124.34,2612.03 ; v1@5308.28,2323.28 ccw(c5292.06,2307.07) 5292.06,2330 ccw(c5292.06,2352.93) v1@5308.28,2336.72 ; MS5611.6@5308.68,2222.89 cw(c5292.46,2206.67) 5315.39,2206.67 cw(c5338.33,2206.67) MS5611.6@5322.11,2222.89 ; MS5611.6@5310.72,2220.77 ccw(c5304.7,2229.61) v1(5315.39,2229.61) ; v1(5315,2330) 5205,2330 ; MS5611.6 v1(5315.39,2229.61) ; MS5611.6@5320.07,2220.77 cw(c5326.08,2229.61) v1(5315.39,2229.61) ; v1@5343.28,2428.28 ccw(c5327.06,2412.07) 5327.06,2435 ccw(c5327.06,2457.93) v1@5343.28,2441.72 ; v1(5350,2435) 5275,2435 5205,2365 5205,2330
SCL/SCLK: HMC5983.1 MPU6/8xxx.23 MS5611.8 P1.8 P2.3 | length 1480.4
  Top Layer w7: v1(5077,2372) 5079,2370 v1(5125,2370) ; v1@5083.72,2365.28 cw(c5095.11,2353.89) 5095.11,2370 ; v1@5083.72,2378.72 ccw(c5104.76,2399.76) 5104.76,2370 ; HMC5983.1 5110,2515.47 5125,2500.47 v1(5125,2435) ; v1@5118.28,2363.28 ccw(c5102.06,2347.07) 5102.06,2370 ccw(c5102.06,2392.93) v1@5118.28,2376.72 ; v1@5118.28,2441.72 ccw(c5102.06,2457.93) 5125,2457.93 ccw(c5147.94,2457.93) v1@5131.72,2441.72 ; v1@5198.28,2306.72 ccw(c5182.06,2322.93) 5205,2322.93 ccw(c5227.94,2322.93) v1@5211.72,2306.72 ; v1(5205,2300) 5205,2365 5265,2425 5265,2505 5276.25,2516.25 MPU6/8xxx.23
  Bottom Layer w7: P1.8@4943,2440.2 4990.8,2440.2 5018,2413 5036,2413 v1(5077,2372) ; v1@5067.5,2372 ccw(c5044.56,2372) 5060.78,2388.22 ccw(c5077,2404.43) v1@5077,2381.5 ; v1@5118.28,2363.28 cw(c5102.06,2347.07) 5125,2347.07 cw(c5147.94,2347.07) v1@5131.72,2363.28 ; v1@5118.28,2376.72 ccw(c5102.06,2392.93) 5125,2392.93 ccw(c5147.94,2392.93) v1@5131.72,2376.72 ; v1@5118.28,2428.28 cw(c5102.06,2412.07) 5125,2412.07 cw(c5147.94,2412.07) v1@5131.72,2428.28 ; v1(5125,2435) v1(5125,2370) 5125,2325 5150,2300 v1(5205,2300) 5385,2300 5413.82,2271.18 MS5611.8 ; v1@5198.28,2293.28 ccw(c5182.06,2277.07) 5182.06,2300 ccw(c5182.06,2322.93) v1@5198.28,2306.72 ; v1@5211.72,2293.28 cw(c5227.94,2277.07) 5227.94,2300 cw(c5227.94,2322.93) v1@5211.72,2306.72 ; MS5611.8@5407.94,2219.77 ccw(c5393.75,2233.96) 5413.82,2233.96 ccw(c5433.88,2233.96) MS5611.8@5419.7,2219.77
SDA/SDI: HMC5983.16 MPU6/8xxx.24 MS5611.7 P1.7 P2.4 | length 1337.7
  Top Layer w7: HMC5983.16@5054.53,2469.76 cw(c5054.53,2435.44) 5078.8,2459.71 ; HMC5983.16@5054.53,2476.76 cw(c5054.53,2459.34) 5066.85,2471.66 ; HMC5983.16@5054.53,2483.76 cw(c5054.53,2483.24) HMC5983.16@5054.9,2483.61 ; HMC5983.16 5085,2453.5 ; v1@5079.46,2442.72 ccw(c5071.73,2453.5) 5085,2453.5 ; v1(5085,2435) 5085,2453.5 ; v1@5090.54,2442.72 cw(c5098.27,2453.5) 5085,2453.5 ; v1@5173.28,2276.72 ccw(c5157.06,2292.93) 5180,2292.93 ccw(c5202.94,2292.93) v1@5186.72,2276.72 ; v1@5173.28,2353.28 cw(c5157.06,2337.07) 5180,2337.07 cw(c5202.94,2337.07) v1@5186.72,2353.28 ; v1(5180,2270) v1(5180,2360) ; v2@5288.82,2472.86 ccw(c5273.91,2491.85) 5297.88,2488.97 ccw(c5321.85,2486.09) v2@5302.86,2471.18 ; v2(5295,2465) MPU6/8xxx.24
  Bottom Layer w7: P1.7@4943,2459.89 4995.11,2459.89 5020,2435 v1(5085,2435) 5101,2419 ; v1@5078.28,2428.28 ccw(c5062.06,2412.07) 5062.06,2435 ccw(c5062.06,2457.93) v1@5078.28,2441.72 ; v1@5085.09,2425.5 cw(c5085.31,2403.31) 5101,2419 ; v1@5094.5,2434.91 ccw(c5116.69,2434.69) 5101,2419 ; v1@5173.28,2263.28 ccw(c5157.06,2247.07) 5157.06,2270 ccw(c5157.06,2292.93) v1@5173.28,2276.72 ; v1(5180,2360) 5285,2465 v2(5295,2465) ; v1@5186.72,2263.28 cw(c5202.94,2247.07) 5202.94,2270 cw(c5202.94,2292.93) v1@5186.72,2276.72 ; MS5611.7@5358.73,2219.77 ccw(c5344.54,2233.96) 5364.61,2233.96 ccw(c5384.67,2233.96) MS5611.7@5370.48,2219.77 ; MS5611.7 5364.61,2255.39 5350,2270 v1(5180,2270) 5125,2270 5101,2294 5101,2419
VIN: C1.1 D1.1 F1.2 ME6206.1 | length 456.8
  Top Layer w10: F1.2 D1.1@4918.74,2105 ; F1.2@4850.61,2094.39 cw(c4876.21,2068.79) 4876.21,2105 cw(c4876.21,2141.21) F1.2@4850.61,2115.61 ; 4902.89,2105 cw(c4902.89,2086.63) D1.1@4915.88,2099.62 ; 4908.97,2105 ccw(c4908.97,2114.77) D1.1@4915.88,2107.86 ; D1.1@4924.12,2125.58 ccw(c4945.95,2147.41) 4945.95,2116.53 ; D1.1@4925,2116.53 C1.1 5023.47,2150 ME6206.1 ; C1.1@4979.04,2107.54 ccw(c4957.33,2085.83) 4957.33,2116.53 ccw(c4957.33,2147.24) C1.1@4979.04,2125.53 ; C1.1@4991.97,2129.25 ccw(c4991.97,2155.2) 5010.32,2136.85 ; C1.1@5004.69,2116.53 cw(c5040.14,2116.53) 5015.07,2141.6 ; ME6206.1@5037.19,2145.18 ccw(c5025.56,2133.56) 5025.56,2150 ccw(c5025.56,2166.44) ME6206.1@5037.19,2154.82
VIN5+: F1.1 P1.10 P2.1 | length 404.5
  Top Layer w10: F1.1 v1(4885,2245) ; F1.1@4840,2210 ccw(c4840,2234.14) 4857.07,2217.07 ; F1.1@4845,2195 cw(c4869.14,2195) F1.1@4852.07,2212.07 ; F1.1@4855,2195 cw(c4903.28,2195) 4869.14,2229.14 ; v1@4877,2245 cw(c4857.69,2245) 4871.34,2231.34 cw(c4885,2217.69) v1@4885,2237
  Bottom Layer w10: v1(4885,2245) 4918,2278 P2.1@4918,2400 ; v1@4885,2253 ccw(c4885,2272.31) 4898.66,2258.66 ccw(c4912.31,2245) v1@4893,2245 ; P2.1@4914.67,2400.19 cw(c4906.65,2392.17) 4918,2392.17 ; 4918,2382.67 cw(c4943.01,2382.67) P2.1@4925.33,2400.36
pads on no net: C15.1 C15.2 C16.1 C16.2 C17.1 C17.2 C18.1 C18.2 C19.1 C19.2 C20.1 C20.2 HMC5983.3 HMC5983.7 HMC5983.14 HMC5983.15 MPU6/8xxx.1 MPU6/8xxx.2 MPU6/8xxx.3 MPU6/8xxx.4 MPU6/8xxx.5 MPU6/8xxx.6 MPU6/8xxx.7 MPU6/8xxx.12 MPU6/8xxx.14 MPU6/8xxx.15 MPU6/8xxx.16 MPU6/8xxx.17 MPU6/8xxx.19 MPU6/8xxx.21 P1.0 P2.0 R11.1 R11.2 R12.1 R12.2 R13.1 R13.2 R14.1 R14.2 R15.1 R15.2 R16.1 R16.2 R17.1 R17.2 R18.1 R18.2 R19.1 R19.2 R20.1 R20.2 R21.1 R21.2 R22.1 R22.2

## Polygon pours and split planes (outlines as drawn)
GND on Top Layer "Top To GND" (solid, remove dead copper, pour order 2): 4770,2820 5635,2820 5635,1955 4770,1955 4770,2820
GND on Bottom Layer "Bottom To GND" (solid, remove dead copper, pour order 4): 4770,2820 5635,2820 5635,1955 4770,1955 4770,2820

## Keep-outs
Keep-Out Layer:
  lines w7: 4770,2015 ccw(c4830,2015) 4830,1955 5575,1955 ccw(c5575,2015) 5635,2015 5635,2760 ccw(c5575,2760) 5575,2820 4830,2820 ccw(c4830,2760) 4770,2760 4770,2015
  lines w8: 5185,2400 5235,2450 5235,2630 5185,2680 5185,2400 ; 5225,2360 5275,2410 5455,2410 5505,2360 5225,2360 ; 5225,2715 5275,2665 5455,2665 5505,2715 5225,2715 ; 5495,2445 5545,2395 5545,2685 5495,2635 5495,2445

## Other copper
Top Layer:
  pour cut-out: 5255,2650 5475,2650 5475,2425 5255,2425
  pour cut-out: 5130,2650 5130,2440 4920,2440 4920,2650
  pour cut-out: 5220,2260 5460,2260 5460,2020 5220,2020
Bottom Layer:
  pour cut-out: 5220,2260 5460,2260 5460,2020 5220,2020
  pour cut-out: 5130,2440 5130,2650 4919.54,2650 4920,2649.54 4920,2440
  pour cut-out: 5475,2650 5255,2650 5255,2425 5475,2425

## Silkscreen, mask and mechanical layers (free items; w line width, h text height)
Top Overlay:
  circle w10: c4165,1445 r25
  lines w7: 3914.82,1459.93 ccw(c3975,1485) 4033.31,1455.85 4005.85,1455.85 ; 4165.85,1234.15 4165.85,1206.69 cw(c4195,1265) 4169.93,1325.18 ; 4175,1480 4162.5,1492.5 4177.5,1507.5 ; 3975,1540 3975,1265 4250,1265 ; 3975,1540 3930,1495 4020,1495 3975,1540 ; 4250,1265 4205,1310 4205,1220 4250,1265
  lines w8: 5525,2255 5506,2274 5505,2274 ; 5525,2295 5505,2275 5505,2274 ; 5575,2344 5595,2364 ; 5615,2344 5595,2364 ; 5505,2274 5595,2274 5595,2364
  lines w10: 4114.75,1444.75 ccw(c4165,1444.75) 4165,1495
  text "QFN下面尽量不要有走线，有也要保证是地线，以免短路" at 5270,3760 h45
  text "地磁计下面千万别走线，要挖铜，同时保证好焊接" at 5270,3610 h45
  text "每个MEMS下方都大面积挖铜，以便手工焊接，包括气压计" at 5265,3425 h45
  text "减震球固定孔都向边移位0.5mm，左上的孔要根据SPI1插口位置进行切割" at 5270,3340 h45
  text "2017.06" at 5750,2775 h60
  text "X" at 5530,2330 h60
  text "Y" at 5490,2290 h60
  text "外置IMU板V4" at 4825,1983 h60
  text "Y" at 3875,1485 h90
  text "Z" at 4085,1480 h90
  text "X" at 4240,1320 h90
Bottom Overlay:
  lines w7: 4827.5,2157.5 4842.5,2142.5 4855,2155 ; 4970.92,1971.51 ccw(c4945.85,2031.69) 4975,2090 ; 4974.15,2060.85 4974.15,2088.31 ; 4980,2120 ccw(c5040.18,2145.07) 5098.49,2115.92 ; 5070.85,2115.85 5098.31,2115.85 ; 4890,2030 4935,1985 4935,2075 4890,2030 ; 4995,2155 5085,2155 5040,2200 4995,2155
  lines w8: 4870,2125 4915,2170 ; 4870,2170 4915,2125 ; 4890,2030 5040,2030 5040,2200
  lines w10: 4840,2145 cw(c4890.25,2145) 4890.25,2094.75
  text "飞行控制器 - IMU板" at 5535,2300 h60
  text "2017.06" at 5205,2220 h60
  text "X" at 5005,2180 h90
  text "Z" at 4830,2120 h90
  text "Y" at 4885,2015 h90